# EAGLE board ModuleBoard (EAGLE 6.3)
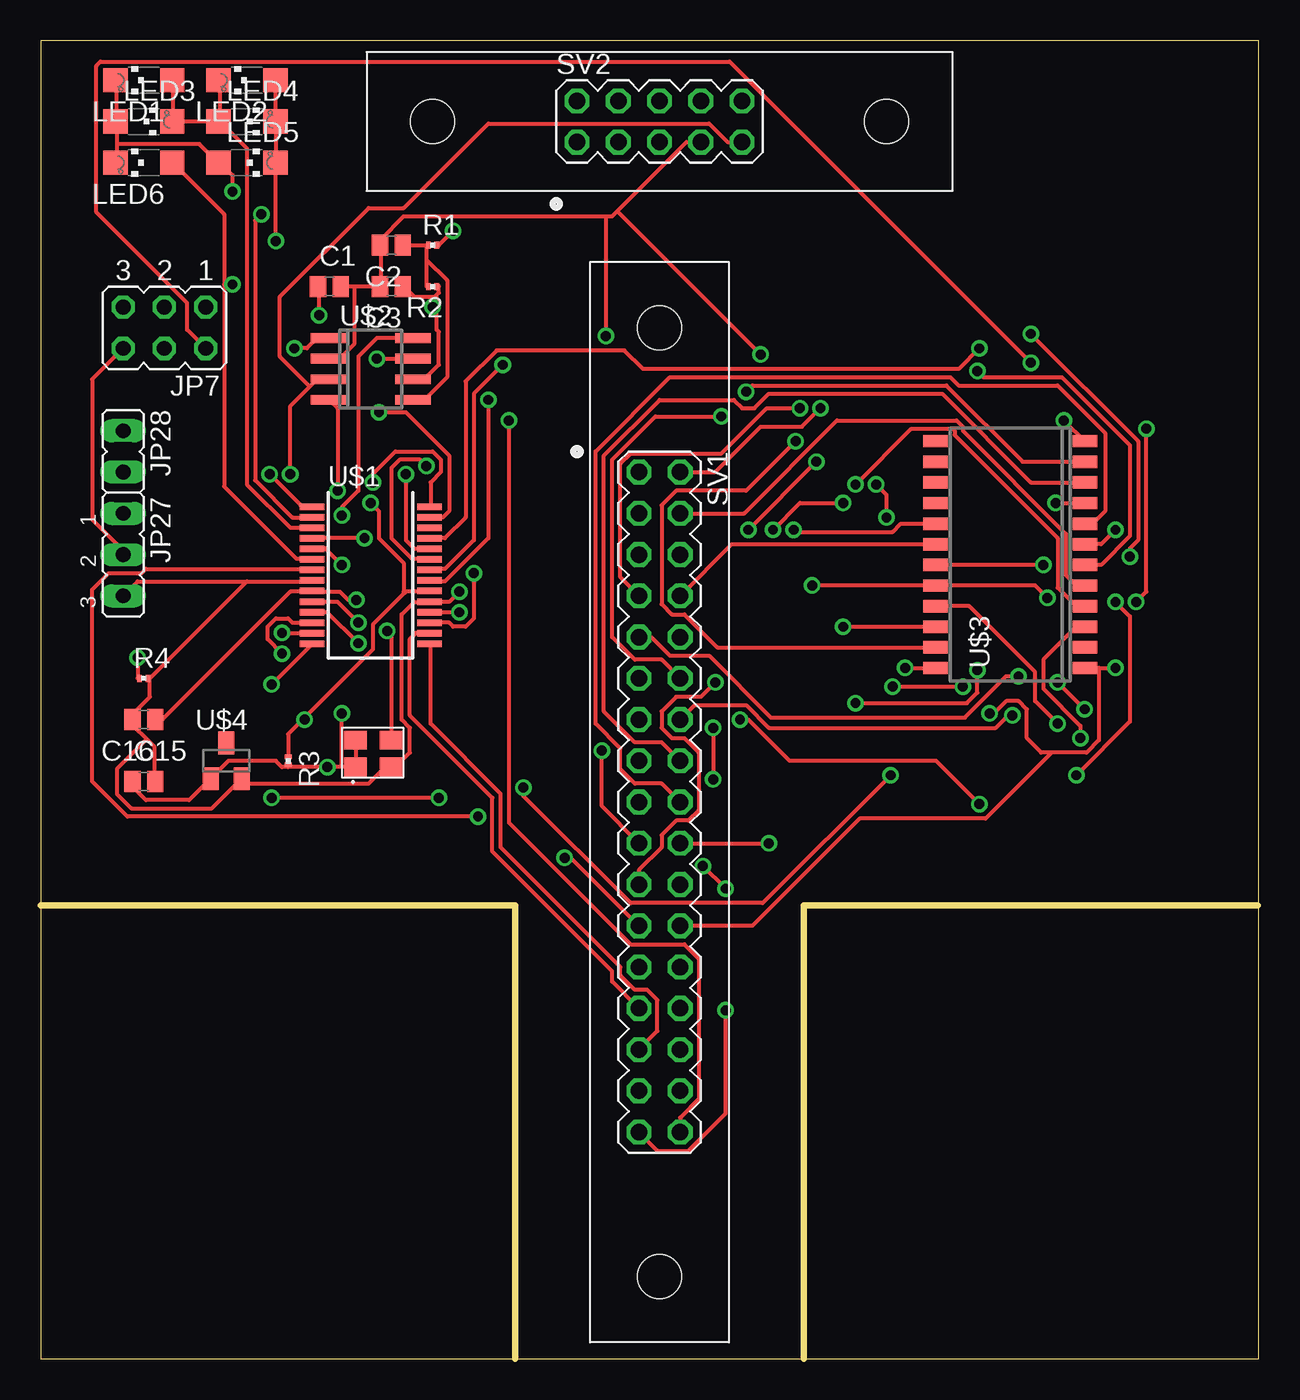
[diagram p0: board, top side]
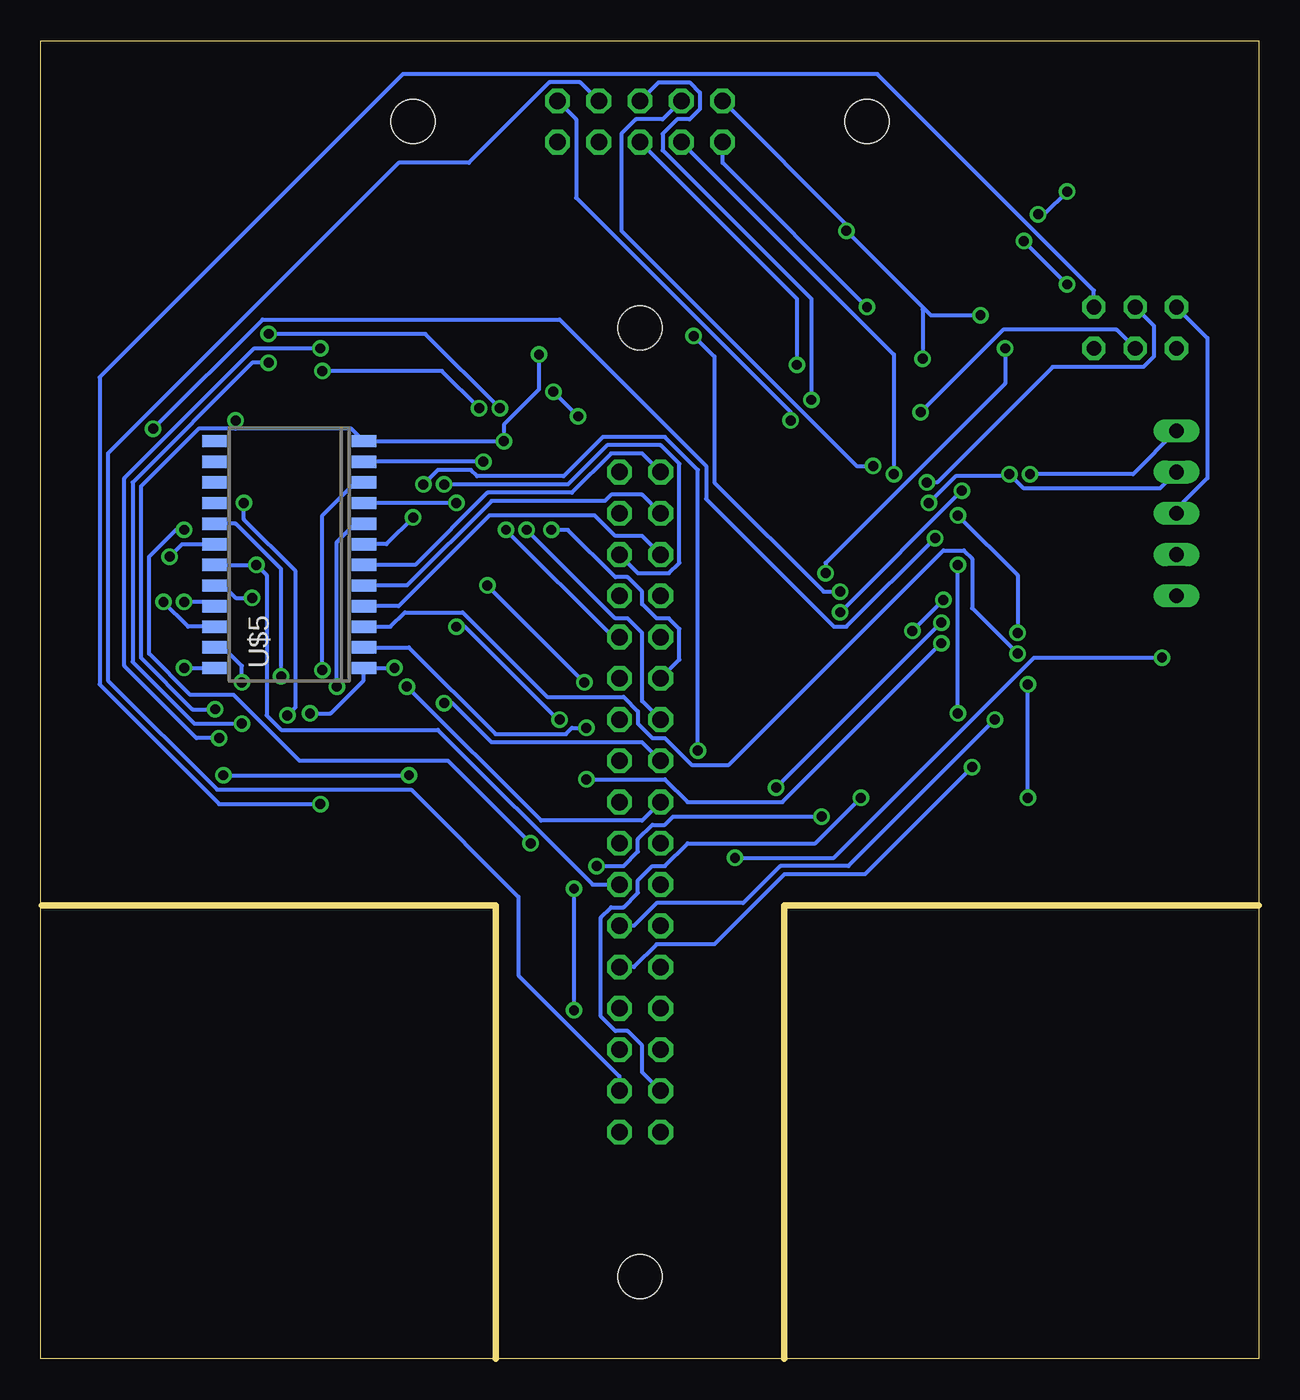
[diagram p1: board, bottom side, seen from below]

Size 75 x 81.18 mm. Coordinates in mm from the lower left corner, seen from the top.
Outline: 29.21,0 0,0 0,27.94
Outline: 29.21,0 46.99,0
Outline: 46.99,0 75,0 75,81.18 0,81.18 0,27.94
Outline: 29.21,0 29.21,27.94 0,27.94
Outline: 46.99,0 46.99,27.94 74.93,27.94
Copper layers (1*16): Top 0.035mm / dielectric 1.5mm / Bottom 0.035mm
Design rules "SJ Design Rules *": minimum track width 10mil, minimum drill 24mil, track to track 10mil, track to pad 10mil, pad to pad 8mil, via to via 10mil, smd to smd 8mil, copper to edge 40mil, drill to drill 10mil, minimum pad ring 10mil, minimum via ring 8mil, stop-mask expansion 4mil, vias tented up to drill 0mil, thermal gap 20mil
tRestrict: area 0,0 to 29.2,27.9; area 47,0 to 74.9,27.9
bRestrict: area 47,0 to 74.9,27.9; area 0,0 to 29.2,27.9

## Footprints (pad centres in the part's own frame; a part is rotated, then mirrored left to right if it is on the bottom)
C0504 = smd 1 x 1.3: 1 -0.7,0; 2 0.7,0
JP3Q = drill 0.914 octagon: 1 -2.54,-1.27; 2 -2.54,1.27; 3 0,-1.27; 4 0,1.27; 5 2.54,-1.27; 6 2.54,1.27
JP2 = drill 0.914 long: 1 -2.54,0; 2 0,0; 3 2.54,0
JP1 = drill 0.914 long: 1 0,-1.27; 2 0,1.27
CHIPLED_1206 = smd 1.5 x 1.5: A 0,-1.75; C 0,1.75
R0201 = smd 0.28 x 0.43: 1 -0.255,0; 2 0.255,0
MA17-2 = drill 1.016 octagon: 1 -20.32,-1.27; 2 -20.32,1.27; 3 -17.78,-1.27; 4 -17.78,1.27; 5 -15.24,-1.27; 6 -15.24,1.27; 7 -12.7,-1.27; 8 -12.7,1.27; 9 -10.16,-1.27; 10 -10.16,1.27; 11 -7.62,-1.27; 12 -7.62,1.27; 13 -5.08,-1.27; 14 -5.08,1.27; 15 -2.54,-1.27; 16 -2.54,1.27; 17 0,-1.27; 18 0,1.27; 19 2.54,-1.27; 20 2.54,1.27; 21 5.08,-1.27; 22 5.08,1.27; 23 7.62,-1.27; 24 7.62,1.27; 25 10.16,-1.27; 26 10.16,1.27; 27 12.7,-1.27; 28 12.7,1.27; 29 15.24,-1.27; 30 15.24,1.27; 31 17.78,-1.27; 32 17.78,1.27; 33 20.32,-1.27; 34 20.32,1.27 | hole 2.692: -29.21,0; 29.21,0
MA05-2 = drill 1.016 octagon: 1 -5.08,-1.27; 2 -5.08,1.27; 3 -2.54,-1.27; 4 -2.54,1.27; 5 0,-1.27; 6 0,1.27; 7 2.54,-1.27; 8 2.54,1.27; 9 5.08,-1.27; 10 5.08,1.27 | hole 2.692: -13.97,0; 13.97,0
SSOP28 = smd 0.4 x 1.5: 1 -4.225,-3.625; 2 -3.575,-3.625; 3 -2.925,-3.625; 4 -2.275,-3.625; 5 -1.625,-3.625; 6 -0.975,-3.625; 7 -0.325,-3.625; 8 0.325,-3.625; 9 0.975,-3.625; 10 1.625,-3.625; 11 2.275,-3.625; 12 2.925,-3.625; 13 3.575,-3.625; 14 4.225,-3.625; 15 4.225,3.625; 16 3.575,3.625; 17 2.925,3.625; 18 2.275,3.625; 19 1.625,3.625; 20 0.975,3.625; 21 0.325,3.625; 22 -0.325,3.625; 23 -0.975,3.625; 24 -1.625,3.625; 25 -2.275,3.625; 26 -2.925,3.625; 27 -3.575,3.625; 28 -4.225,3.625
SO-08 = smd 0.6 x 2.2: 1 -1.905,-2.6; 2 -0.635,-2.6; 3 0.635,-2.6; 4 1.905,-2.6; 5 1.905,2.6; 6 0.635,2.6; 7 -0.635,2.6; 8 -1.905,2.6
SOIC-24 = smd 0.762 x 1.524: 1 -6.985,-4.6; 2 -5.715,-4.6; 3 -4.445,-4.6; 4 -3.175,-4.6; 5 -1.905,-4.6; 6 -0.635,-4.6; 7 0.635,-4.6; 8 1.905,-4.6; 9 3.175,-4.6; 10 4.445,-4.6; 11 5.715,-4.6; 12 6.985,-4.6; 13 6.985,4.6; 14 5.715,4.6; 15 4.445,4.6; 16 3.175,4.6; 17 1.905,4.6; 18 0.635,4.6; 19 -0.635,4.6; 20 -1.905,4.6; 21 -3.175,4.6; 22 -4.445,4.6; 23 -5.715,4.6; 24 -6.985,4.6
SOT23 = smd 1 x 1.4: 1 -0.95,-1.1; 2 0.95,-1.1; 3 0,1.1
CTS632 = smd 1.397 x 1.143: 1 -2.21,-1.651; 2 0,-1.651; 3 0,0; 4 -2.21,0

## Placement (x,y rotation side)
C1  100pF  [C0504]  17.78,66.04 0 top
C2  47nF  [C0504]  21.59,68.58 180 top
C3  100pF  [C0504]  21.59,66.04 180 top
C15  10nF  [C0504]  6.35,35.56 0 top
C16  15pF  [C0504]  6.35,39.37 180 top
JP7  [JP3Q]  7.62,63.5 180 top
JP27  [JP2]  5.08,49.53 270 top
JP28  [JP1]  5.08,55.88 180 top
LED1  [CHIPLED_1206]  6.35,78.74 90 top
LED2  [CHIPLED_1206]  12.7,78.74 90 top
LED3  [CHIPLED_1206]  6.35,76.2 270 top
LED4  [CHIPLED_1206]  12.7,76.2 270 top
LED5  [CHIPLED_1206]  12.7,73.66 270 top
LED6  [CHIPLED_1206]  6.35,73.66 90 top
R1  1k3  [R0201]  24.13,68.58 0 top
R2  1k3  [R0201]  24.13,66.04 180 top
R3  150  [R0201]  15.24,36.83 270 top
R4  0  [R0201]  6.35,41.91 0 top
SV1  [MA17-2]  38.1,34.29 270 top
SV2  AMP_LATCH_10  [MA05-2]  38.1,76.2 0 top
U$1  PIC18F23K22  [SSOP28]  20.32,48.26 270 top
U$2  TJA1040  [SO-08]  20.32,60.96 270 top
U$3  CD4514BM96E4  [SOIC-24]  59.69,49.53 90 top
U$4  LM4040  [SOT23]  11.43,36.83 0 top
U$5  CD4514BM96E4  [SOIC-24]  59.69,49.53 90 bottom
U$11  CTS632  [CTS632]  21.59,38.1 0 top

## Library data of the parts
C1-C3 C15 C16 R1-R4 = rcl
JP7 JP27 JP28 = jumper
LED1-LED6 = led
SV1 = SolarJackets_BMS; OC_FARNELL: unknown; OC_NEWARK: unknown
SV2 = SolarJackets_BMS; PART_NUM: 5499922-1
U$1 U$2 U$4 = sj 9-29
U$3 U$5 = SolarJackets_BMS
U$11 = SolarJackets

## Nets
12V+: SV1.34 SV2.10
12V-: SV1.32 SV2.8
AGND_PLANE: R4.1 SV1.23
CAN: U$1.13 U$2.8
CANH: C1.1 R1.2 SV2.2 U$2.7
CANL: C3.1 R2.1 SV2.1 U$2.6
CLK: SV1.31 U$1.14
CS: SV1.33 U$1.7
DGND: SV1.25
DIN: SV1.29 U$1.15
DOUT: SV1.27 U$1.16
GND: C1.2 C2.2 C3.2 C15.2 C16.2 JP27.3 R4.2 SV2.7 U$1.8 U$1.19 U$2.2 U$3.12 U$3.23 U$4.2 U$5.12 U$5.23 U$11.2
I2C_CS: SV2.6 U$1.21
I2C_SCL: SV2.5 U$1.22
I2C_SDI: SV2.4 U$1.23
I2C_SDO: SV2.3 U$1.24
N$1: LED1.A LED2.C LED3.C LED4.A U$1.3
N$2: U$1.4 U$5.22
N$4: U$1.10 U$5.21
N$5: U$1.11 U$5.2
N$6: U$1.18 U$2.4
N$7: U$1.12 U$5.3
N$8: LED1.C LED3.A LED5.A LED6.C U$1.2
N$10: LED2.A LED4.C LED5.C LED6.A U$1.6
N$11: U$1.17 U$2.1
N$12: JP28.1 U$1.1
N$13: JP7.5 JP27.1
N$14: JP7.6 JP27.2
N$15: U$3.2
N$17: U$1.25 U$3.3
N$21: JP7.1 U$3.22
N$22: JP7.2 U$3.21
N$75: C2.1 R1.1 R2.2 U$2.5
N$78: C16.1 U$1.9 U$11.3
PGC: JP7.4 U$1.27
PGD: JP7.3 U$1.28
RELAYA: SV1.21 U$3.20 U$5.20
RELAYB: SV1.22 U$3.19 U$5.19
VDD_PLANE: JP28.2 R3.1 SV1.24 SV2.9 U$1.20 U$2.3 U$3.1 U$3.24 U$5.1 U$5.24
VREF: C15.1 R3.2 SV1.26 U$1.5 U$4.1 U$11.1 U$11.4
X0A: SV1.1 U$5.6
X0B: SV1.2 U$3.6
X1A: SV1.3 U$5.5
X1B: SV1.4 U$3.5
X2A: SV1.5 U$5.4
X2B: SV1.6 U$3.4
X3A: SV1.7 U$5.18
X3B: SV1.8 U$3.18
X4A: SV1.9 U$5.17
X4B: SV1.10 U$3.17
Y0A: SV1.11 U$5.11
Y0B: SV1.12 U$3.11
Y1A: SV1.13 U$5.9
Y1B: SV1.14 U$3.9
Y2A: SV1.15 U$5.10
Y2B: SV1.16 U$3.10
Y3A: SV1.17 U$5.8
Y3B: SV1.18 U$3.8
Y4A: SV1.19 U$5.7
Y4B: SV1.20 U$3.7

## Tracks (layer width: path | path; a pad name or v marks a point on that pad's centre or on a via)
12V+  (via drill 0.61)
  Top 0.254: SV1.34 39.37,14.86 40.51,16 40.51,24.64 39.62,25.53 36.32,25.53 28.83,33.02 v28.83,57.78
  Bottom 0.254: v28.83,57.78 28.83,58.29 42.04,71.5 42.04,76.33 SV2.10
12V-
  Bottom 0.254: SV1.32 39.37,17.4 45.59,23.62 45.59,28.45 52.2,35.05 64.14,35.05 70.87,41.78 70.87,55.75 52.96,73.66 48.64,73.66 43.69,78.61 41.78,78.61 SV2.8
AGND_PLANE  (via drill 0.61)
  Top 0.254: v5.97,43.18 5.97,41.91 R4.1 | v32.26,30.86 32.64,30.86 SV1.23
  Bottom 0.254: v5.97,43.18 13.84,43.18 26.16,30.86 v32.26,30.86
CAN  (via drill 0.61)
  Top 0.254: v14.86,44.7 16.64,44.7 U$1.13 | v18.54,51.94 18.54,52.45 19.56,53.47 19.56,61.72 20.7,62.87 U$2.8
  Bottom 0.254: v14.86,44.7 14.86,48.26 v18.54,51.94
CANH  (via drill 0.61)
  Top 0.254: v25.4,69.47 24.51,68.58 R1.2 | v17.14,64.26 17.14,66.04 C1.1 | v20.7,61.59 U$2.7
  Bottom 0.254: SV2.2 25.4,69.85 v25.4,69.47 20.64,64.71 | v17.14,64.26 20.19,64.26 20.64,64.71 | v20.7,61.59 20.7,64.64 20.64,64.71
CANL  (via drill 0.61)
  Top 0.254: 24.32,65.47 24.26,65.41 22.99,65.41 22.35,66.04 C3.1 | 24.32,65.47 24.51,65.66 24.51,66.04 R2.1 | 24.38,64.77 24.38,63.37 24.51,63.25 24.51,61.21 23.62,60.33 U$2.6 | 24.38,64.77 24.38,65.41 24.32,65.47 | 24.38,64.77 v24.13,64.77
  Bottom 0.254: SV2.1 33.02,73.66 v24.13,64.77
CLK  (via drill 0.61)
  Top 0.254: v14.22,41.53 16.64,43.94 U$1.14 | v24.51,34.54 v14.22,34.54
  Bottom 0.254: v14.22,34.54 v14.22,41.53 | v24.51,34.54 27.3,31.75 35.18,31.75 36.58,30.35 37.34,30.35 38.23,29.46 38.23,28.7 39.12,27.81 39.88,27.81 40.51,27.18 40.51,21.08 39.62,20.19 38.86,20.19 37.97,19.3 37.97,17.65 SV1.31
CS  (via drill 0.61)
  Top 0.254: v26.92,33.4 5.33,33.4 3.17,35.56 3.17,47.37 4.19,48.39 6.22,48.39 6.48,48.64 16.64,48.64 U$1.7 | v42.16,28.96 v40.77,30.35 | v42.16,21.46 42.16,15.11 39.88,12.83 37.97,12.83 SV1.33
  Bottom 0.254: v26.92,33.4 36.07,33.4 36.58,32.89 37.34,32.89 38.23,32 38.23,31.24 39.12,30.35 v40.77,30.35 | v42.16,21.46 v42.16,28.96
DIN
  Top 0.254: SV1.29 37.97,20.19 37.97,22.1 37.34,22.73 36.58,22.73 35.69,23.62 35.69,24.13 28.32,31.5 28.32,34.8 24,39.12 24,43.94 U$1.15
DOUT
  Top 0.254: SV1.27 35.18,23.24 35.18,23.88 27.81,31.24 27.81,34.54 22.73,39.62 22.73,44.32 23.11,44.7 23.88,44.7 U$1.16
GND  (via drill 0.61)
  Top 0.254: U$3.23 41.66,43.81 39.62,45.85 38.86,45.85 38.23,46.48 38.23,52.58 39.12,53.47 43.43,53.47 v46.48,56.52 | v64.26,40.01 v62.61,41.66 | v62.99,57.78 64.26,56.52 U$3.12 | 6.73,41.91 6.73,40.77 5.71,39.75 5.71,39.37 | 6.54,38.16 5.71,38.99 5.71,39.37 | 6.54,38.16 6.99,37.72 6.99,35.56 C15.2 | 5.71,39.37 C16.2 | 12.7,47.88 5.97,47.88 JP27.3 | 12.7,47.88 16.64,47.88 U$1.8 | 12.7,47.88 6.73,41.91 | 6.73,41.91 R4.2 | 6.54,38.16 4.7,36.32 4.7,34.8 5.59,33.91 10.54,33.91 12.32,35.69 U$4.2 12.45,35.69 12.7,35.43 20.19,35.43 21.21,36.45 U$11.2 21.84,36.45 22.73,37.34 22.73,38.86 22.23,39.37 22.23,45.85 22.99,46.61 23.88,46.61 U$1.19 24,46.61 25.15,46.61 v25.78,47.24 | 19.3,66.04 C3.2 20.95,66.04 20.95,68.58 | 19.3,66.04 C1.2 | U$2.2 18.41,61.59 19.3,62.48 19.3,66.04 | SV2.7 39.75,74.93 35.5,70.67 | 35.5,70.67 35.18,70.36 34.8,70.36 | 34.8,70.36 22.35,70.36 20.95,68.96 20.95,68.58 | 20.95,68.58 C2.2 | 34.8,70.36 v34.8,62.99 | 35.5,70.67 v44.32,61.85
  Bottom 0.254: U$5.23 63.75,43.81 62.61,42.67 v62.61,41.66 | v64.26,40.01 65.66,40.01 68.83,43.18 68.83,53.72 65.28,57.28 62.99,57.28 | 62.99,57.28 55.88,57.28 55.12,56.52 U$5.12 v46.48,56.52 46.48,57.53 44.32,59.69 v44.32,61.85 | 62.99,57.28 v62.99,57.78 | v25.78,47.24 26.8,47.24 33.53,53.98 33.53,61.72 v34.8,62.99
I2C_CS  (via drill 0.61)
  Top 0.254: v27.56,59.05 27.56,50.55 24.89,47.88 24,47.88 U$1.21
  Bottom 0.254: v27.56,59.05 27.56,65.28 36.7,74.42 36.7,75.44 35.81,76.33 35.05,76.33 34.42,76.96 34.42,77.98 35.05,78.61 36.96,78.61 SV2.6
I2C_SCL  (via drill 0.61)
  Top 0.254: v28.45,61.21 26.67,59.44 26.67,50.42 24.89,48.64 24,48.64 U$1.22
  Bottom 0.254: v28.45,61.21 28.45,65.28 SV2.5
I2C_SDI  (via drill 0.61)
  Top 0.254: v23.75,54.99 23.37,55.37 22.1,55.37 21.59,54.86 21.59,50.55 22.86,49.28 23.88,49.28 U$1.23
  Bottom 0.254: v23.75,54.99 24.77,54.99 39.24,69.47 39.24,75.44 38.35,76.33 36.7,76.33 SV2.4
I2C_SDO  (via drill 0.61)
  Top 0.254: v22.48,54.48 22.48,50.42 22.99,49.91 23.88,49.91 U$1.24
  Bottom 0.254: v22.48,54.48 22.48,61.85 SV2.3
N$1
  Top 0.254: 8.13,76.2 8.13,78.74 LED1.A | 11.05,76.2 12.7,74.55 12.7,53.85 15.37,51.18 16.64,51.18 U$1.3 | 11.05,76.2 11.05,78.74 LED2.C | 11.05,76.2 LED4.A 8.13,76.2 | 8.13,76.2 LED3.C
N$2  (via drill 0.61)
  Top 0.254: v19.94,50.55 16.76,50.55 U$1.4 | v68.07,57.28 68.07,47.24 v67.44,46.61
  Bottom 0.254: v19.94,50.55 25.4,45.09 26.16,45.09 34.04,52.96 34.04,54.99 43.05,64.01 61.34,64.01 v68.07,57.28 | v67.44,46.61 65.91,45.09 U$5.22
N$4  (via drill 0.61)
  Top 0.254: v19.56,45.34 18.29,46.61 16.76,46.61 U$1.10 | v29.72,35.18 29.72,34.67 36.32,28.07 44.45,28.07 v52.32,35.94 | v63.75,35.94 67.06,39.24 67.06,45.72 v66.17,46.61
  Bottom 0.254: v29.72,35.18 v19.56,45.34 | v63.75,35.94 v52.32,35.94 | v66.17,46.61 64.64,46.61 64.39,46.35 U$5.21
N$5  (via drill 0.61)
  Top 0.254: v19.56,44.07 17.65,45.97 16.76,45.97 U$1.11 | v41.4,38.86 v41.4,35.69
  Bottom 0.254: v19.56,44.07 29.34,34.29 35.18,34.29 36.58,35.69 v41.4,35.69 | v41.4,38.86 42.29,38.86 42.67,38.48 46.99,38.48 52.32,43.81 U$5.2
N$6  (via drill 0.61)
  Top 0.254: v25.78,45.97 24,45.97 U$1.18 | v18.29,53.47 18.29,58.55 17.78,59.05 U$2.4
  Bottom 0.254: v18.29,53.47 v25.78,45.97
N$7  (via drill 0.61)
  Top 0.254: v14.86,43.43 13.97,44.32 13.97,45.09 14.48,45.59 15.24,45.59 15.49,45.34 16.64,45.34 U$1.12
  Bottom 0.254: v14.86,43.43 17.65,46.23 17.65,49.28 18.16,49.78 19.43,49.78 32.64,36.58 34.92,36.58 36.58,38.23 37.34,38.23 38.23,39.12 38.23,39.88 39.12,40.77 43.81,40.77 49.02,45.97 52.58,45.97 53.47,45.09 U$5.3
N$8  (via drill 0.61)
  Top 0.254: 4.7,76.2 4.7,74.8 | 4.7,74.8 4.7,73.66 LED6.C | 4.7,76.2 4.7,78.74 LED1.C | 4.7,76.2 LED3.A | v13.59,70.48 13.21,70.1 13.21,54.1 15.49,51.82 16.64,51.82 U$1.2 | v11.81,71.88 11.81,72.9 11.05,73.66 LED5.A 10.92,73.66 9.78,74.8 4.7,74.8
  Bottom 0.254: v13.59,70.48 13.21,70.48 v11.81,71.88
N$10  (via drill 0.61)
  Top 0.254: 14.48,76.2 14.48,73.66 | 14.48,76.2 14.48,78.74 LED2.A | 14.48,76.2 LED4.C | 11.3,66.17 11.3,70.48 8.13,73.66 LED6.A | 11.3,66.17 11.3,53.72 15.75,49.28 16.64,49.28 U$1.6 | v14.48,68.83 14.48,73.66 | 11.3,66.17 v11.81,66.17 | 14.48,73.66 LED5.C
  Bottom 0.254: v11.81,66.17 v14.48,68.83
N$11  (via drill 0.61)
  Top 0.254: v26.67,48.39 26.67,45.59 26.16,45.09 25.4,45.09 25.15,45.34 24,45.34 U$1.17 | v15.62,62.23 16.38,62.23 17.02,62.87 U$2.1
  Bottom 0.254: v26.67,48.39 26.67,49.02 15.62,60.07 v15.62,62.23
N$12  (via drill 0.61)
  Top 0.254: v14.1,54.48 16,52.58 16.64,52.58 U$1.1
  Bottom 0.254: v14.1,54.48 7.75,54.48 JP28.1
N$13
  Bottom 0.254: JP27.1 5.08,52.32 3.17,54.23 3.17,62.87 JP7.5
N$14
  Top 0.254: JP27.2 5.08,49.78 3.17,51.69 3.17,60.33 JP7.6
N$17  (via drill 0.61)
  Top 0.254: v57.78,62.23 56.52,60.96 37.08,60.96 35.94,62.1 28.07,62.1 26.16,60.2 26.16,51.82 24.89,50.55 24,50.55 U$1.25 | v64.01,38.23 64.01,38.99 61.72,41.27 61.72,43.05 63.75,45.09 U$3.3
  Bottom 0.254: v57.78,62.23 61.85,62.23 69.85,54.23 69.85,42.67 65.41,38.23 v64.01,38.23
N$21  (via drill 0.61)
  Top 0.254: v49.4,45.09 U$3.22 | v43.05,39.37 43.56,39.37 46.1,36.83 55.12,36.83 v57.78,34.16
  Bottom 0.254: v49.4,45.09 48.9,45.09 43.18,39.37 v43.05,39.37 | v57.78,34.16 64.01,34.16 71.37,41.53 71.37,60.45 52.7,79.12 23.5,79.12 10.16,65.79 JP7.1
N$22  (via drill 0.61)
  Top 0.254: U$3.21 57.15,46.35 61.21,42.29 61.21,40.51 v62.61,39.12 | v60.96,61.34 42.42,79.88 3.68,79.88 3.43,79.63 3.43,70.61 9.02,65.02 9.02,63.37 JP7.2
  Bottom 0.254: v62.61,39.12 65.53,39.12 69.34,42.93 69.34,53.98 61.98,61.34 v60.96,61.34
N$75
  Top 0.254: 23.75,68.58 23.75,67.69 | 23.75,67.69 23.75,66.04 R2.2 | C2.1 23.75,68.58 | 23.75,68.58 R1.1 | U$2.5 23.62,59.05 25.02,60.45 25.02,66.42 23.75,67.69
N$78  (via drill 0.61)
  Top 0.254: C16.1 7.49,39.37 15.37,47.24 16.64,47.24 U$1.9 16.76,47.24 18.41,47.24 18.92,46.74 v19.43,46.74 | U$11.3 21.59,44.58 v21.34,44.83
  Bottom 0.254: v19.43,46.74 v21.34,44.83
PGC  (via drill 0.61)
  Top 0.254: v20.83,58.29 22.48,58.29 25.15,55.63 25.15,52.2 24.77,51.82 24,51.82 U$1.27
  Bottom 0.254: v20.83,58.29 15.75,63.37 8.76,63.37 JP7.4
PGD  (via drill 0.61)
  Top 0.254: v20.45,53.98 20.45,54.48 21.84,55.88 24.13,55.88 24.64,55.37 24.64,54.61 24,53.98 24,52.58 U$1.28
  Bottom 0.254: v20.45,53.98 19.81,53.98 12.7,61.09 7.11,61.09 6.48,61.72 6.48,63.63 JP7.3
RELAYA  (via drill 0.61)
  Top 0.254: v61.98,46.86 61.21,47.62 U$3.20 v47.5,47.62 | SV1.21 36.83,30.1 38.23,31.5 38.23,32.26 39.12,33.15 39.88,33.15 40.51,33.78 40.51,37.34 39.62,38.23 38.86,38.23 38.23,38.86 38.23,39.88 39.12,40.77 40.64,40.77 v41.53,41.66
  Bottom 0.254: v61.98,46.86 62.99,46.86 63.75,47.62 U$5.20 | v47.5,47.62 v41.53,41.66
RELAYB  (via drill 0.61)
  Top 0.254: v61.72,48.9 U$3.19
  Bottom 0.254: U$5.19 v61.72,48.9 61.09,48.26 61.09,39.62 60.2,38.73 50.55,38.73 41.02,29.21 SV1.22
VDD_PLANE  (via drill 0.61)
  Top 0.254: v53.21,42.55 U$5.1 | U$3.1 65.15,42.55 | 65.15,42.55 v66.17,42.55 | v58.42,39.75 58.67,39.75 59.44,40.51 60.2,40.51 60.71,40.01 60.71,38.23 61.59,37.34 62.23,37.34 | 62.23,37.34 64.39,37.34 65.15,38.1 65.15,42.55 | SV1.24 43.81,26.67 50.42,33.27 58.17,33.27 62.23,37.34 | R3.1 15.24,38.48 16.19,39.43 | 16.19,39.43 20.45,43.69 20.45,45.21 22.42,47.18 | 22.42,47.18 22.48,47.24 23.88,47.24 U$1.20 | U$2.3 17.02,60.33 16.57,59.88 | 16.57,59.88 15.37,58.67 v15.37,54.48 | SV2.9 42.29,74.93 41.15,76.07 27.56,76.07 22.35,70.87 20.19,70.87 14.73,65.41 14.73,61.72 16.57,59.88 | v20.32,52.7 20.83,52.2 20.83,50.55 22.35,49.02 22.35,47.24 22.42,47.18 | v16.26,39.37 16.19,39.43
  Bottom 0.254: v53.21,42.55 U$5.1 55.12,42.55 55.12,41.78 57.15,39.75 v58.42,39.75 | v66.17,42.55 U$3.1 | JP28.2 6.1,53.59 14.48,53.59 v15.37,54.48 15.37,54.36 18.67,54.36 v20.32,52.7 | SV1.24 38.48,26.67 37.08,28.07 31.75,28.07 29.46,30.35 25.27,30.35 v16.26,39.37
VREF  (via drill 0.61)
  Top 0.254: C15.1 5.71,35.56 5.71,35.18 6.48,34.42 9.14,34.42 10.41,35.69 U$4.1 10.54,35.81 11.56,36.83 14.48,36.83 14.86,36.45 15.24,36.45 | 18.54,36.45 U$11.1 19.43,36.45 19.43,38.1 U$11.4 | 18.54,36.45 v17.65,36.45 15.24,36.45 | v18.54,48.9 17.53,49.91 16.76,49.91 U$1.5 | 18.54,36.45 v18.54,39.75 | 15.24,36.45 R3.2
  Bottom 0.254: v18.54,39.75 v18.54,48.9 | SV1.26 38.48,24.13 37.08,25.53 33.53,25.53 29.21,29.84 24.26,29.84 v17.65,36.45
X0A
  Bottom 0.254: U$5.6 51.94,48.9 47.5,53.34 42.29,53.34 39.88,55.75 37.97,55.75 SV1.1
X0B  (via drill 0.61)
  Top 0.254: U$3.6 65.28,48.9 67.06,50.67 67.06,56.26 62.87,60.45 58.04,60.45 v57.66,60.83 | v48.01,58.55 46.86,57.4 44.32,57.4 41.53,54.61 SV1.2
  Bottom 0.254: v57.66,60.83 50.29,60.83 v48.01,58.55
X1A
  Bottom 0.254: U$5.5 52.45,47.62 47.24,52.83 40.26,52.83 39.88,53.21 37.97,53.21 SV1.3
X1B
  Top 0.254: U$3.5 63.75,47.62 63.12,48.26 63.12,50.8 56.77,57.15 56.77,57.4 56.39,57.78 49.02,57.78 43.31,52.07 SV1.4
X2A
  Bottom 0.254: U$5.4 52.96,46.35 47.37,51.94 40.89,51.94 39.62,50.67 37.97,50.67 SV1.5
X2B  (via drill 0.61)
  Top 0.254: U$3.4 63.75,46.35 62.61,47.5 62.61,50.55 56.26,56.9 56.26,57.15 56.13,57.28 53.59,57.28 v50.16,53.85
  Bottom 0.254: v50.16,53.85 42.55,53.85 40.13,56.26 36.83,56.26 35.69,55.12 35.69,49.02 36.32,48.39 38.23,48.39 SV1.6
X3A  (via drill 0.61)
  Top 0.254: v67.06,49.4 67.06,49.91 67.56,50.42 67.56,56.52 v60.96,63.12 | v46.74,58.55 44.7,58.55 41.91,55.75 36.32,55.75 35.69,55.12 35.69,48.13 SV1.7
  Bottom 0.254: U$5.18 66.29,50.16 v67.06,49.4 | v60.96,63.12 51.31,63.12 v46.74,58.55
X3B
  Top 0.254: U$3.18 42.55,50.16 SV1.8
X4A  (via drill 0.61)
  Top 0.254: v60.2,42.04 59.44,42.04 56.9,39.5 44.96,39.5 41.15,43.31 38.73,43.31 37.59,44.45 SV1.9
  Bottom 0.254: U$5.17 62.99,51.44 60.2,48.64 v60.2,42.04
X4B  (via drill 0.61)
  Top 0.254: U$3.17 52.96,51.44 52.45,50.93 46.48,50.93 v46.35,51.05
  Bottom 0.254: v46.35,51.05 39.75,44.45 SV1.10
Y0A  (via drill 0.61)
  Top 0.254: v43.56,51.05 v47.75,55.24
  Bottom 0.254: v47.75,55.24 U$5.11 | v43.56,51.05 42.55,51.05 39.62,48.13 38.86,48.13 37.97,47.24 37.97,46.48 37.08,45.59 36.32,45.59 35.69,44.96 35.69,43.05 SV1.11
Y0B  (via drill 0.61)
  Top 0.254: U$3.11 60.45,55.24 55.75,59.94 43.81,59.94 v43.43,59.56 | v41.91,58.04 37.85,58.04 35.18,55.37 35.18,44.45 36.58,43.05 38.23,43.05 SV1.12
  Bottom 0.254: v41.91,58.04 v43.43,59.56
Y1A  (via drill 0.61)
  Top 0.254: v49.4,52.7 46.74,52.7 v45.09,51.05
  Bottom 0.254: v49.4,52.7 U$5.9 | v45.09,51.05 39.62,45.59 38.86,45.59 37.97,44.7 37.97,40.51 SV1.13
Y1B  (via drill 0.61)
  Top 0.254: v62.48,52.7 U$3.9 | v59.82,39.62 59.56,39.62 58.8,38.86 44.83,38.86 43.43,40.26 40.26,40.26 SV1.14
  Bottom 0.254: v62.48,52.7 62.48,51.69 59.31,48.51 59.31,40.13 v59.82,39.62
Y2A  (via drill 0.61)
  Top 0.254: v57.66,42.42 57.66,41.02 57.02,40.39 v50.16,40.39
  Bottom 0.254: U$5.10 55.63,53.98 57.66,51.94 v57.66,42.42 | v50.16,40.39 49.66,40.39 47.24,37.97 37.97,37.97 SV1.15
Y2B
  Top 0.254: U$3.10 60.96,53.98 55.5,59.44 44.83,59.44 43.94,58.55 43.18,58.55 42.67,59.05 38.1,59.05 34.67,55.63 34.67,39.88 36.58,37.97 38.23,37.97 SV1.16
Y3A  (via drill 0.61)
  Top 0.254: v52.45,41.4 v56.77,41.4
  Bottom 0.254: U$5.8 55.63,51.44 56.77,50.29 v56.77,41.4 | v52.45,41.4 44.2,33.15 37.97,33.15 SV1.17
Y3B
  Top 0.254: U$3.8 64.77,51.44 65.53,52.2 65.53,57.02 62.61,59.94 56.52,59.94 56.01,60.45 38.73,60.45 34.16,55.88 34.16,39.12 35.69,37.59 35.69,36.32 36.58,35.43 38.23,35.43 SV1.18
Y4A  (via drill 0.61)
  Top 0.254: v52.07,51.82 52.07,53.21 v51.44,53.85 | v34.54,37.47 34.54,34.04 SV1.19
  Bottom 0.254: U$5.7 53.72,50.16 v52.07,51.82 | v51.44,53.85 50.55,54.74 48.51,54.74 48.13,54.36 42.8,54.36 40.39,56.77 36.58,56.77 34.54,54.74 v34.54,37.47
Y4B  (via drill 0.61)
  Top 0.254: U$3.7 65.28,50.16 v66.17,51.05 | SV1.20 v44.83,31.75
  Bottom 0.254: v66.17,51.05 66.67,51.05 68.33,49.4 68.33,43.43 65.79,40.89 63.12,40.89 59.05,36.83 49.91,36.83 v44.83,31.75